# Altium PCB PCB1.PcbDoc (part 2 of 2)
Units mm, origin at the board's own origin, x right, y up, seen from the top; angles counter-clockwise.
Board outline 40 x 60 mm, 2 copper layers (Top Layer, Bottom Layer); 75 components, 46 nets, 264 pads, 43 vias.
Unrouted connection lines stored in the file: 9.
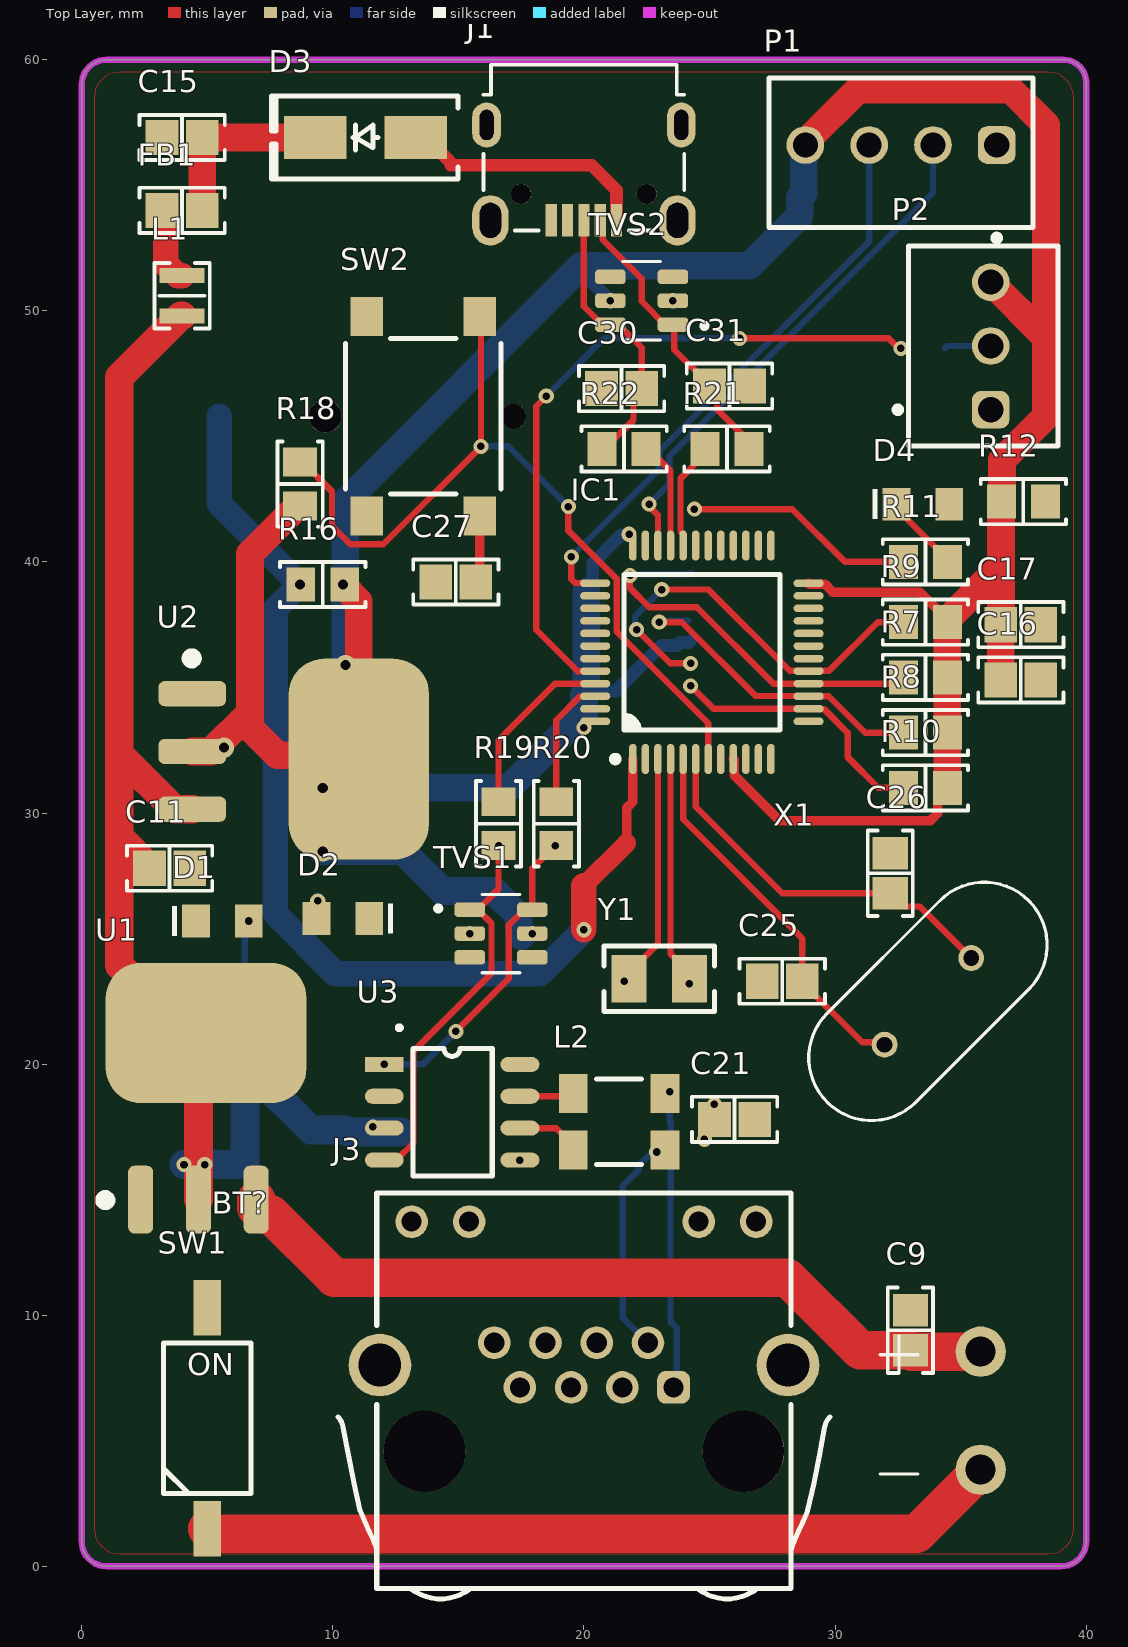
[diagram p0: Top Layer view]

## Via types
v1: diameter 0.6, hole 0.3, Top Layer to Bottom Layer, 37 vias
v2: diameter 0.8, hole 0.4, Top Layer to Bottom Layer, 6 vias

## Nets (pads, with @x,y where several pads share a name; then routed paths per layer and width w, separated by ;. In a path a pad name is that pad's centre, name@x,y a point inside that pad or via, vN(x,y) a via of type N, cw(c..) or ccw(c..) an arc to the next point about the centre after c; other vN are vias at no path point) (continued)
+5V: (continued)
  Top Layer w1.143: C11.2 2.7,27.85 1.5,29.05 ; L1.1 3.943,49.8 1.5,47.357 1.5,32.348 ; U2.3 3.697,30.151 1.5,32.348 ; U1.2 4.649,20.932 U1.4 4.194,21.237 1.5,23.931 1.5,29.05 ; 1.5,29.05 1.5,32.348
  Bottom Layer w1.143: v1(4.075,16) C10.2 R3.2 6.503,19.422 7.078,19.422 9.121,17.379 10.521,17.379 C18.2 C19.1
  other v1: 4.9,16 11.6,17.5
BOOT0: IC1.44 R17.2 | length 27.7
  Top Layer w0.254: v1(18.5,46.6) 18.1,46.2 18.1,37.3 19.75,35.65 IC1.44 ; v1(26.2,48.9) 32.131,48.9 32.531,48.5 v1(32.625,48.5)
  Bottom Layer w0.254: v1(18.5,46.6) 20.8,48.9 v1(26.2,48.9)
CAN_F_N: J3.2 L2.2 R15.2 Z1.2 | length 8.7
  Bottom Layer w0.254: J3.2 21.55,9.905 Z1.2 21.55,15.15 22.177,15.777 22.177,15.952 22.725,16.5 v1(22.9,16.5)
CAN_F_P: J3.1 L2.3 R14.2 Z1.1 | length 11.9
  Bottom Layer w0.254: v1(23.425,18.9) 23.425,17.709 23.454,17.68 23.454,14.59 23.45,14.586 Z1.1 23.45,9.75 23.7,9.5 23.7,7.255 J3.1
CAN_N: L2.1 U3.6 | length 2.6
  Top Layer w0.254: U3.6 18.9,17.45 19.575,16.775 L2.1
CAN_P: L2.4 U3.7 | length 2.2
  Top Layer w0.254: U3.7 19.47,18.72 L2.4
CAN_RX: C33.2 R19.2 TVS1.1 U3.4 | length 15.5
  Top Layer w0.254: U3.4 12.525,16.18 13.2,16.855 13.2,20.5 16.319,23.619 16.319,25.606 TVS1.1@15.775,26.15 ; TVS1.1 TVS1.1@15.775,26.15 ; v1(16.6,28.7) 16.6,26.975 TVS1.1@15.775,26.15
CAN_RX_F: IC1.45 R19.1 | length 7.2
  Top Layer w0.254: R19.1 16.6,32.9 18.85,35.15 IC1.45
CAN_TX: C32.2 R20.2 TVS1.6 U3.1 | length 12.6
  Top Layer w0.254: v1(14.9,21.3) 17,23.4 17,25.525 17.625,26.15 TVS1.6 17.945,27.795 18.352,28.202 18.352,28.252 18.8,28.7 v1(18.85,28.7)
  Bottom Layer w0.254: v1(12.05,19.99) 13.59,19.99 v1(14.9,21.3)
CAN_TX_F: IC1.46 R20.1 | length 5.2
  Top Layer w0.254: R20.1 18.9,33.7 19.841,34.641 20.441,34.641 IC1.46
GND: C1.2 C2.1 C3.2 C9.1 C10.1 C11.1 C12.1 C13.1 C14.1 C15.1 C16.1 C17.1 C18.1 C19.2 C20.1 C21.1 C22.2 C23.1 C24.1 C25.1 C26.1 C27.1 C28.1 C29.1 C30.1 C31.1 C32.1 C33.1 D1.1 D2.1 IC1.8 IC1.23 IC1.35 IC1.47 J1.5 J1.Shell J2.6 J2.10 J2.11 J3.4 J3.6 J3.8 J3.Shell J4.NEG P1.1 P2.1 R5.1 R6.1 R13.2 SW1.2 SW2.B1 SW2.B2 TVS1.2 TVS2.2 U3.2 Z1.3
  other v1: 15.455,25.2 23.545,50.4
NetBT?_N: BT?.N SW1.1 | length 31.9
  Top Layer w1.532: SW1.1 5.2,1.3 33.25,1.3 BT?.N
NetBT?_P: BT?.P C9.2 U1.3 | length 31.5
  Top Layer w1.532: U1.3 6.949,14.286 7.215,14.02 7.533,14.02 10.053,11.5 28.1,11.5 31,8.6 C9.2 33.05,8.55 BT?.P
NetC13_2: C13.2 R1.1 R5.2 U1.1
NetC14_2: C14.2 R2.1 R6.2 U2.1
NetC15_2: C15.2 D3.2 FB1.2 | length 7.4
  Top Layer w1.102: FB1.2 C15.2 D3.2
NetC20_2: C20.2 U3.5
  other v1: 17.45,16.18
NetC21_2: C21.2 R14.1 R15.1
  other v1: 24.8,17 25.2,18.4
NetC27_2: C27.2 SW2.A2 | length 2.7
  Top Layer w0.381: C27.2 15.85,39.35 SW2.A2
NetD1_2: D1.2 R3.1 | length 4.6
  Bottom Layer w0.254: R3.1 6.5,25.456 6.65,25.606 v1(6.65,25.7)
NetD2_2: D2.2 R4.1
  other v1: 9.4,26.5
NetD3_1: D3.1 J1.1 | length 10.1
  Top Layer w0.508: D3.1 13.7,56.9 14.7,55.9 14.7,55.8 20.3,55.8 21.3,54.8 J1.1
NetD4_2: D4.2 R12.2
NetFB1_1: FB1.1 L1.2 | length 3
  Top Layer w1.016: FB1.1 3.342,53.858 3.342,51.874 3.816,51.4 L1.2
NetJ2_2: IC1.14 J2.2 R10.1 | length 10.7
  Top Layer w0.254: v1(24.25,35.06) 25.16,34.15 IC1.14 28.959,34.141 29.559,34.141 30.5,33.2 30.5,32.229 31.729,31 R10.1
NetJ2_3: IC1.17 J2.3 R9.1 | length 16.6
  Top Layer w0.254: v1(22.1,37.3) 23.44,35.96 v1(24.25,35.96) ; v1@23.166,38.966 v1(23.1,38.9) 24.955,38.9 28.196,35.659 28.941,35.659 IC1.17 28.959,35.659 29.759,35.659 31.7,37.6 R9.1
  Bottom Layer w0.254: v1(22.1,37.3) 22.034,37.366 22.034,37.834 v1(23.1,38.9)
NetJ2_5: IC1.15 J2.5 R8.1 | length 12.7
  Top Layer w0.254: v1(23,37.6) 23.9,37.6 26.841,34.659 28.941,34.659 IC1.15 29.75,34.65 31.2,33.2 R8.1
  Bottom Layer w0.254: v1(23,37.6) 23.066,37.666 J2.5@24.156,37.666
NetJ2_7: IC1.16 J2.7 R7.1 | length 15.5
  Top Layer w0.254: v1(21.838,39.466) 21.838,38.962 22.6,38.2 24.5,38.2 27.55,35.15 IC1.16 32.475,35.15 R7.1
  Bottom Layer w0.254: v1(21.838,39.466) 21.884,39.513 24.203,39.513 J2.7
NetJ2_9: J2.9 R11.2 | length 9.2
  Top Layer w0.254: v1(24.4,42.1) 28.3,42.1 30.4,40 R11.2
NetP2_2: P2.2 R17.1 | length 1.9
  Bottom Layer w0.254: R17.1 34.475,48.6 P2.2
NetR13_1: R13.1 U3.8
NRST: IC1.7 R18.1 SW2.A1 | length 33
  Top Layer w0.254: R18.1 8.8,43.975 9.969,42.806 9.969,41.421 10.691,40.7 12.009,40.7 15.9,44.591 v1(15.9,44.6) 15.9,49.725 SW2.A1 ; v1(19.383,42.2) 19.383,41.238 21.304,39.317 21.304,37.483 21.304,37.223 24.95,33.577 IC1.7
  Bottom Layer w0.254: v1(15.9,44.6) 16.983,44.6 v1(19.383,42.2)
PC14/OSC32_IN: C23.2 IC1.3 Y1.1 | length 9.4
  Top Layer w0.254: v1(21.6,23.3) 21.6,23.45 22.95,24.8 IC1.3
PC15/OSC32_OUT: C24.2 IC1.4 Y1.2 | length 9.3
  Top Layer w0.254: IC1.4 23.45,24.4 24.2,23.65 v1(24.2,23.2)
PD0/OSC_IN: C25.2 IC1.5 X1.1 | length 15.2
  Top Layer w0.254: IC1.5 23.95,29.75 28.7,25 C25.2 28.7,23.25 31.079,20.871 31.878,20.871 X1.1
PD1/OSC_OUT: C26.2 IC1.6 X1.2 | length 15.4
  Top Layer w0.254: IC1.6 24.45,30.25 27.9,26.8 C26.2 32.723,26.277 33.374,26.277 X1.2
SD_CardD: D4.1 R11.1 | length 3.1
  Top Layer w0.254: D4.1 32.873,41.877 32.873,41.702 34.475,40.1 R11.1
SWCLK: IC1.37 P1.3 | length 23.2
  Top Layer w0.254: v1(19.5,40.2) 19.5,39.308 19.649,39.159 20.441,39.159 IC1.37
  Bottom Layer w0.254: v1(19.5,40.2) 23,43.7 23,44.4 31.36,52.76 P1.3
SWDIO: IC1.34 P1.2 | length 20.8
  Top Layer w0.254: v1(22.6,42.3) 22.6,42.206 22.95,41.856 IC1.34
  Bottom Layer w0.254: v1(22.6,42.3) 23.4,43.1 23.4,44.2 33.9,54.7 P1.2
USB_DM: C31.2 J1.2 R21.2 TVS2.1 | length 12.1
  Top Layer w0.254: J1.2 20.748,53.502 20.748,52.831 22.3,51.279 22.3,50.375 23.225,49.45 TVS2.1 23.6,49.395 23.6,48.45 25,47.05 C31.2 ; TVS2.1@23.645,49.45 TVS2.1@23.965,49.45 ; C31.2@25.2,47 25.307,46.893 25.307,46.068 26.775,44.6 R21.2@26.775,44.5
USB_DM_F: IC1.32 R21.1 | length 4.4
  Top Layer w0.254: IC1.32 23.95,41.112 23.846,41.216 23.846,43.321 24.377,43.852 24.377,43.952 24.925,44.5 R21.1@25.025,44.5
USB_DP: C30.2 J1.3 R22.2 TVS2.6 | length 10.9
  Top Layer w0.254: J1.3 20,50.185 20.735,49.45 TVS2.6 21.375,49.45 22.3,48.525 C30.2 ; R22.2@20.925,44.5 20.925,44.6 21.977,45.652 21.977,46.377 C30.2@22.4,46.8
USB_DP_F: IC1.33 R22.1 | length 4.2
  Top Layer w0.254: R22.1@22.675,44.5 22.675,44.4 23.45,43.625 IC1.33
VBAT: IC1.1 J4.POS R16.2 | length 43.2
  Top Layer w0.381: 21.7,28.8 21.7,30.2 21.95,30.45 IC1.1
  Top Layer w0.762: 20,27.1 21.7,28.8
  Top Layer w1.016: v1(20,25.352) 20,27.1
  Bottom Layer w1.016: J4.POS 5.47,42.33 v2(8.7,39.1) 7.7,38.1 7.7,26 10.1,23.6 18.248,23.6 v1(20,25.352)
pads on no net: IC1.2 IC1.10 IC1.11 IC1.12 IC1.13 IC1.18 IC1.19 IC1.20 IC1.21 IC1.22 IC1.25 IC1.26 IC1.27 IC1.28 IC1.29 IC1.30 IC1.31 IC1.38 IC1.39 IC1.40 IC1.41 IC1.42 IC1.43 J1.4 J1.MH1 J1.MH2 J2.1 J2.8 J3.3 J3.5 J3.7 J3.9 J3.10 J3.11 J3.12 J3.M1 J3.M2 J4.None TVS1.3 TVS1.4 TVS2.3 TVS2.4

## Polygon pours and split planes (outlines as drawn)
GND on Top Layer "NONET_L01_P003" (solid, shelved, pour order 3): 1.5,59.5 ccw(c1.5,58.5) 0.5,58.5 0.5,1.5 ccw(c1.5,1.5) 1.5,0.5 38.5,0.5 ccw(c38.5,1.5) 39.5,1.5 39.5,58.5 ccw(c38.5,58.5) 38.5,59.5
GND on Bottom Layer "NONET_L02_P002" (solid, shelved, pour order 2): 1.5,59.5 ccw(c1.5,58.5) 0.5,58.5 0.5,1.5 ccw(c1.5,1.5) 1.5,0.5 38.5,0.5 ccw(c38.5,1.5) 39.5,1.5 39.5,58.5 ccw(c38.5,58.5) 38.5,59.5

## Keep-outs
Keep-Out Layer:
  lines w0.254: 40,1 cw(c39,1) 39,0 1,0 cw(c1,1) 0,1 0,59 cw(c1,59) 1,60 39,60 39.1,60 cw(c39.1,59.1) 40,59.1 40,1 ; 40,1 40,1

## Text inside footprints (layer, text, board x,y; h text height)
J1: Top Courtyard "PCB Edge" at 21.3,59.8 h0.41 r180
J2: Bottom Courtyard "Prohibited area" at 32.12,41.71 h1.02 r90
J4: Bottom Overlay "+" at 3.21,44.98 h1.88; Bottom Overlay "-" at 24.84,45.03 h1.88
SW1: Top Overlay "ON" at 4.2,7.6 h0.89; Top Component Outline "ON" at 4.2,7.6 h0.89